# EAGLE board pointModule (EAGLE 5.11)
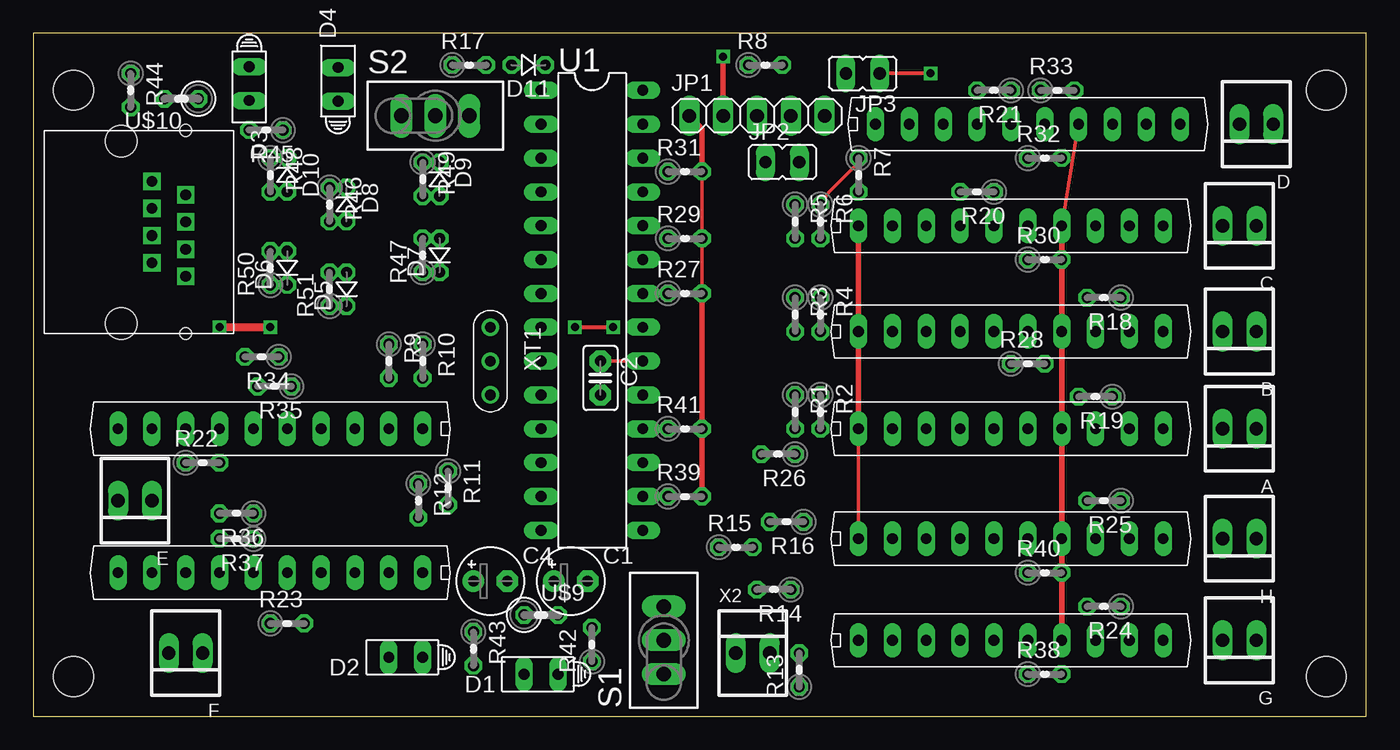
[diagram p0: board, top side]
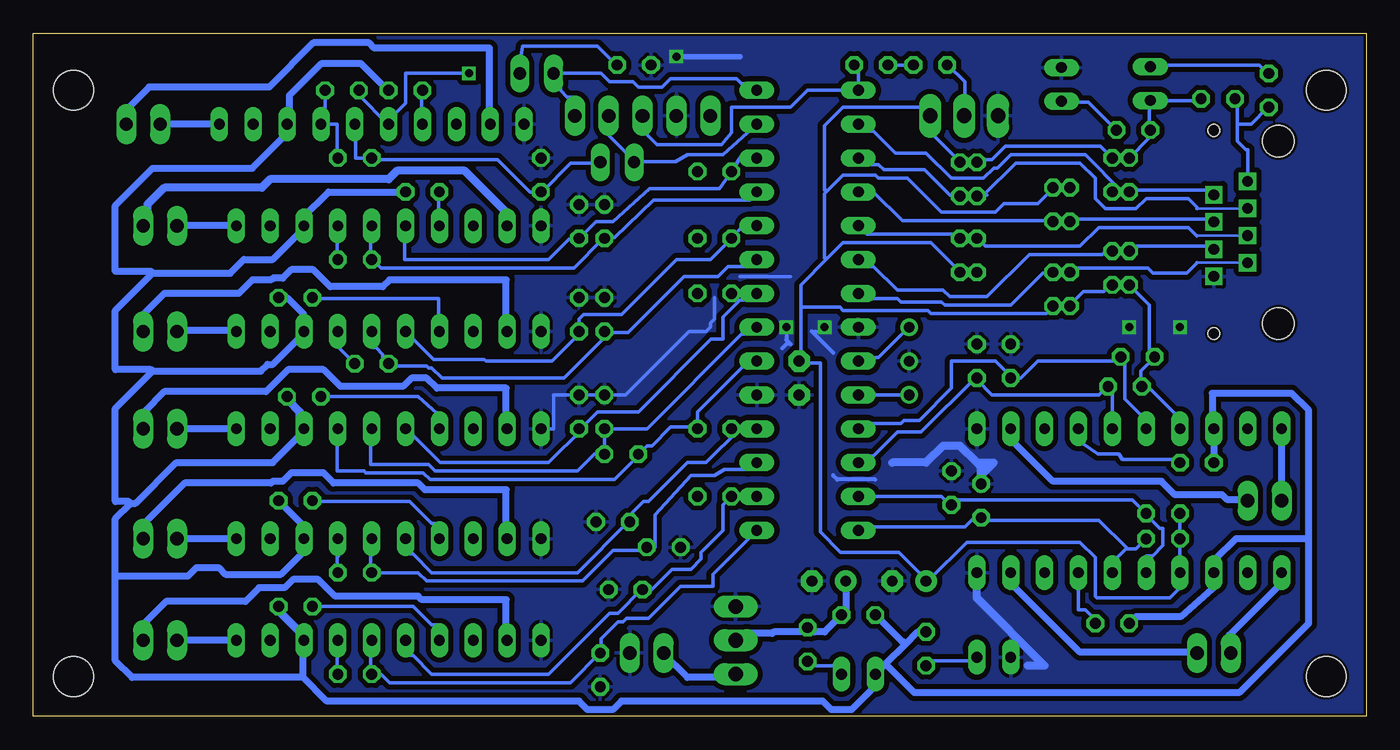
[diagram p1: board, bottom side, seen from below]

Size 100 x 51.27 mm. Coordinates in mm from the lower left corner, seen from the top.
Outline: 0,0 100,0 100,51.27 0,51.27 0,0
Copper layers (1*16): Top 0.035mm / dielectric 1.5mm / Bottom 0.035mm
Design rules "default *": minimum track width 10mil, minimum drill 24mil, track to track 15mil, track to pad 16mil, pad to pad 20mil, via to via 15mil, smd to smd 15mil, copper to edge 8mil, drill to drill 8mil, minimum pad ring 10mil, minimum via ring 8mil, stop-mask expansion 4mil, vias tented up to drill 0mil, thermal gap 10mil
Net classes: 1 12v: width 0.508 mm
Holes 3 mm at 3,47 97,47 97,3 3,3

## Footprints (pad centres in the part's own frame; a part is rotated, then mirrored left to right if it is on the bottom)
22-23-2021 = drill 1 long: 1 -1.27,0; 2 1.27,0
E2,5-5 = drill 0.813 pad 1.6 round: + -1.27,0 | drill 0.813 pad 1.6 octagon: - 1.27,0
C2.5-2 = drill 0.813 pad 1.6 octagon: 1 -1.27,0; 2 1.27,0
HLMP6 = drill 0.813 long: A -1.27,0; K 1.27,0
D-2.5 = drill 0.813 octagon: A 1.27,0; C -1.27,0
1X05 = drill 1.016 long: 1 -5.08,0; 2 -2.54,0; 3 0,0; 4 2.54,0; 5 5.08,0
JP1 = drill 0.914 long: 1 0,-1.27; 2 0,1.27
0204V = drill 0.813 octagon: 1 -1.27,0; 2 1.27,0
TL3XPO = drill 1.1 pad 1.422 long: 1 -2.54,0; 2 0,0; 3 2.54,0
DIL28-3 = drill 0.813 long: 1 -16.51,-3.81; 2 -13.97,-3.81; 3 -11.43,-3.81; 4 -8.89,-3.81; 5 -6.35,-3.81; 6 -3.81,-3.81; 7 -1.27,-3.81; 8 1.27,-3.81; 9 3.81,-3.81; 10 6.35,-3.81; 11 8.89,-3.81; 12 11.43,-3.81; 13 13.97,-3.81; 14 16.51,-3.81; 15 16.51,3.81; 16 13.97,3.81; 17 11.43,3.81; 18 8.89,3.81; 19 6.35,3.81; 20 3.81,3.81; 21 1.27,3.81; 22 -1.27,3.81; 23 -3.81,3.81; 24 -6.35,3.81; 25 -8.89,3.81; 26 -11.43,3.81; 27 -13.97,3.81; 28 -16.51,3.81
HSIP10 = drill 0.8 long: 1 -11.43,0; 2 -8.89,0; 3 -6.35,0; 4 -3.81,0; 5 -1.27,0; 6 1.27,0; 7 3.81,0; 8 6.35,0; 9 8.89,0; 10 11.43,0
0207/2V = drill 0.813 octagon: 1 -1.27,0; 2 1.27,0
C-00159 = drill 0.8 square: P$1 0,0.8; P$2 2.54,-0.22; P$3 0,-1.24; P$4 2.54,-2.26; P$5 0,-3.28; P$6 2.54,-4.3; P$7 0,-5.32; P$8 2.54,-6.34 | hole 2.4: -2.3,-9.885; -2.3,3.805 | hole 0.9: 2.54,4.605; 2.54,-10.635
S3P = drill 0.8 round: P$1 -2.54,0; P$2 0,0; P$3 2.54,0

## Placement (x,y rotation side)
A  22-23-2021  [22-23-2021]  90.49,21.59 180 top
B  22-23-2021  [22-23-2021]  90.49,28.89 180 top
C  22-23-2021  [22-23-2021]  90.49,36.83 180 top
C1  100 uF  [E2,5-5]  40.32,10.16 0 top
C2  0.1 uF  [C2.5-2]  42.55,25.4 270 top
C4  100 uF  [E2,5-5]  34.29,10.16 0 top
D  22-23-2021  [22-23-2021]  91.76,44.45 180 top
D1  HLMP6  [HLMP6]  38.1,3.17 180 top
D2  HLMP6  [HLMP6]  27.94,4.45 180 top
D3  HLMP6  [HLMP6]  16.19,47.5 270 top
D4  HLMP6  [HLMP6]  22.86,47.43 90 top
D5  1N4148DO35-7  [D-2.5]  23.5,32.07 90 top
D6  1N4148DO35-7  [D-2.5]  19.05,33.66 90 top
D7  1N4148DO35-7  [D-2.5]  30.48,34.61 90 top
D8  1N4148DO35-7  [D-2.5]  23.5,38.42 270 top
D9  1N4148DO35-7  [D-2.5]  30.48,40.32 270 top
D10  1N4148DO35-7  [D-2.5]  19.05,40.64 270 top
D11  [D-2.5]  37.15,48.9 180 top
E  22-23-2021  [22-23-2021]  7.62,16.19 180 top
F  22-23-2021  [22-23-2021]  11.43,4.76 180 top
G  22-23-2021  [22-23-2021]  90.49,5.71 180 top
H  22-23-2021  [22-23-2021]  90.49,13.34 180 top
JP1  [1X05]  54.29,45.09 0 top
JP2  [JP1]  56.2,41.59 270 top
JP3  [JP1]  62.23,48.26 90 top
R1  100k Ohm  [0204V]  57.15,22.86 270 top
R2  100k Ohm  [0204V]  59.05,22.86 270 top
R3  100k Ohm  [0204V]  57.15,30.16 270 top
R4  100k Ohm  [0204V]  59.05,30.16 270 top
R5  100k Ohm  [0204V]  57.15,37.15 270 top
R6  100k Ohm  [0204V]  59.05,37.15 270 top
R7  100k Ohm  [0204V]  61.91,40.64 270 top
R8  100k Ohm  [0204V]  54.93,48.9 0 top
R9  100k Ohm  [0204V]  26.67,26.67 270 top
R10  100k Ohm  [0204V]  29.21,26.67 270 top
R11  100k Ohm  [0204V]  31.11,17.14 270 top
R12  100k Ohm  [0204V]  28.89,16.19 270 top
R13  100k Ohm  [0204V]  57.47,3.49 90 top
R14  100k Ohm  [0204V]  55.56,9.53 180 top
R15  100k Ohm  [0204V]  52.7,12.7 0 top
R16  100k Ohm  [0204V]  56.52,14.61 180 top
R17  10k Ohm  [0204V]  32.7,48.9 0 top
R18  100k Ohm  [0204V]  80.33,31.43 180 top
R19  100k Ohm  [0204V]  79.69,24 180 top
R20  100k Ohm  [0204V]  70.8,39.37 180 top
R21  100k Ohm  [0204V]  72.07,46.99 180 top
R22  100k Ohm  [0204V]  12.7,19.05 0 top
R23  100k Ohm  [0204V]  19.05,6.99 0 top
R24  100k Ohm  [0204V]  80.33,8.26 180 top
R25  100k Ohm  [0204V]  80.33,16.19 180 top
R26  1k Ohm  [0204V]  55.88,19.68 180 top
R27  1k Ohm  [0204V]  48.9,31.75 0 top
R28  1k Ohm  [0204V]  74.61,26.48 0 top
R29  1k Ohm  [0204V]  48.9,35.88 0 top
R30  1k Ohm  [0204V]  75.88,34.29 0 top
R31  1k Ohm  [0204V]  48.9,40.89 0 top
R32  1k Ohm  [0204V]  75.88,41.91 0 top
R33  1k Ohm  [0204V]  76.83,46.99 0 top
R34  1k Ohm  [0204V]  17.14,26.99 180 top
R35  1k Ohm  [0204V]  18.1,24.77 180 top
R36  1k Ohm  [0204V]  15.24,15.24 180 top
R37  1k Ohm  [0204V]  15.24,13.34 180 top
R38  1k Ohm  [0204V]  75.88,3.17 0 top
R39  1k Ohm  [0204V]  48.9,16.51 0 top
R40  1k Ohm  [0204V]  75.88,10.79 0 top
R41  1k Ohm  [0204V]  48.9,21.59 0 top
R42  10k Ohm  [0204V]  41.91,5.4 90 top
R43  2k Ohm  [0204V]  33.02,5.08 270 top
R44  10k Ohm  [0204V]  7.3,46.99 270 top
R45  2k Ohm  [0204V]  17.46,44.01 180 top
R46  1k Ohm  [0204V]  22.23,38.42 270 top
R47  1k Ohm  [0204V]  29.21,34.61 90 top
R48  1k Ohm  [0204V]  17.78,40.64 270 top
R49  1k Ohm  [0204V]  29.21,40.32 270 top
R50  1k Ohm  [0204V]  17.78,33.66 90 top
R51  1k Ohm  [0204V]  22.23,32.07 90 top
S1  TL36PO  [TL3XPO]  47.31,5.71 90 top
S2  TL36PO  [TL3XPO]  30.16,45.09 0 top
U1  PIC18F2420-I/SP  [DIL28-3]  41.91,30.48 270 top
U$1  TA7291  [HSIP10]  73.34,21.59 0 top
U$2  TA7291  [HSIP10]  73.34,28.89 0 top
U$3  TA7291  [HSIP10]  73.34,36.83 0 top
U$4  TA7291  [HSIP10]  74.61,44.45 0 top
U$5  TA7291  [HSIP10]  17.78,21.59 180 top
U$6  TA7291  [HSIP10]  17.78,10.79 180 top
U$7  TA7291  [HSIP10]  73.34,5.71 0 top
U$8  TA7291  [HSIP10]  73.34,13.34 0 top
U$9  POLYSWITCH  [0207/2V]  38.1,7.62 0 top
U$10  POLYSWITCH  [0207/2V]  11.11,46.35 180 top
U$11  AKI-RJ45  [C-00159]  8.89,39.37 0 top
X2  22-23-2021  [22-23-2021]  53.98,4.76 0 top
XT1  CSTLS  [S3P]  34.29,26.67 270 top

## Library data of the parts
A B C D E F G H X2 = con-molex; MF: MOLEX; MPN: 22-23-2021; OC_FARNELL: 1462926; OC_NEWARK: 25C3832
C1 C4 R1-R51 = rcl
C2 = capacitor-wima
D1-D4 = display-hp; MF: AGILENT TECHNOLOGIES; MPN: HLMP-6500; OC_FARNELL: 1652490; OC_NEWARK: 40K0088
D5-D11 = diode
JP1 = pinhead
JP2 JP3 = jumper
S1 S2 = switch
U1 = pic18fxx20
U$1-U$8 = TA7291P
U$9-U$11 = myparts
XT1 = TOG

## Nets
+5V: C2.1 C4.+ D3.K D5.C D6.C D7.C D8.C D9.C D10.C JP1.1 R26.2 R27.2 R28.2 R29.2 R30.2 R31.2 R32.2 R33.2 R34.2 R35.2 R36.2 R37.2 R38.2 R39.2 R40.2 R41.2 R45.2 R46.1 R47.1 R48.1 R49.1 R50.1 R51.1 S2.3 U1.20 U$1.7 U$2.7 U$3.7 U$4.7 U$5.7 U$6.7 U$7.7 U$8.7 U$10.1
+12V [12v]: C1.+ R42.2 S1.2 U$9.2
GND: C1.- C2.2 C4.- D2.K D4.K JP1.2 R1.1 R2.1 R3.1 R4.1 R5.1 R6.1 R7.1 R8.1 R9.1 R10.1 R11.1 R12.1 R13.1 R14.1 R15.1 R16.1 S1.3 S2.1 U1.8 U1.19 U$1.1 U$2.1 U$3.1 U$4.1 U$5.1 U$6.1 U$7.1 U$8.1 U$11.P$8 X2.2 XT1.P$2
N$1 [12v]: S1.1 X2.1
N$2 [signal]: D6.A R50.2 U1.6 U$11.P$6
N$3: D5.A R51.2 U1.7 U$11.P$7
N$4: D11.C JP1.3 U1.1
N$5: JP1.5 JP3.2 U1.28
N$6: R17.1 S2.2
N$7: R18.2 U$2.4
N$8: R1.2 R26.1 U1.21 U$1.6
N$9: U1.9 XT1.P$1
N$10: U1.10 XT1.P$3
N$11: R2.2 R27.1 U1.22 U$1.5
N$12 [12v]: A.1 U$1.2
N$13 [12v]: A.2 U$1.10
N$14: D11.A R17.2
N$15: R4.2 R29.1 U1.24 U$2.5
N$16 [12v]: B.1 U$2.2
N$17 [12v]: B.2 U$2.10
N$18: JP1.4 JP2.1 U1.27
N$19: R6.2 R31.1 U1.26 U$3.5
N$20 [12v]: C.1 U$3.2
N$21 [12v]: C.2 U$3.10
N$23: JP3.1 R8.2 R33.1 U$4.5
N$24 [12v]: D.1 U$4.2
N$25 [12v]: D.2 U$4.10
N$26 [signal]: D8.A R46.2 U1.4 U$11.P$4
N$27: R10.2 R35.1 U1.12 U$5.5
N$28 [12v]: E.1 U$5.2
N$29 [12v]: E.2 U$5.10
N$31: R12.2 R37.1 U1.14 U$6.5
N$32 [12v]: F.1 U$6.2
N$33 [12v]: F.2 U$6.10
N$34 [signal]: D7.A R47.2 U1.5 U$11.P$5
N$35: R14.2 R39.1 U1.16 U$7.5
N$36 [12v]: G.1 U$7.2
N$37 [12v]: G.2 U$7.10
N$39: R16.2 R41.1 U1.18 U$8.5
N$40 [12v]: H.1 U$8.2
N$41 [12v]: H.2 U$8.10
N$42: R19.2 U$1.4
N$43 [signal]: D10.A R48.2 U1.2 U$11.P$2
N$44: R20.2 U$3.4
N$45: R21.2 U$4.4
N$46: R22.2 U$5.4
N$47: R23.2 U$6.4
N$48: R24.2 U$7.4
N$49: R25.2 U$8.4
N$50: R3.2 R28.1 U1.23 U$2.6
N$51: R5.2 R30.1 U1.25 U$3.6
N$52: JP2.2 R7.2 R32.1 U$4.6
N$53: R9.2 R34.1 U1.11 U$5.6
N$54: R11.2 R36.1 U1.13 U$6.6
N$55: R13.2 R38.1 U1.15 U$7.6
N$56: R15.2 R40.1 U1.17 U$8.6
N$57 [signal]: D9.A R49.2 U1.3 U$11.P$3
N$66: D2.A R43.2
N$67: D1.A R42.1
N$68: R44.2 U$10.2 U$11.P$1
N$69: D3.A R44.1
N$70: D4.A R45.1
N$72 [12v]: D1.K R18.1 R19.1 R20.1 R21.1 R22.1 R23.1 R24.1 R25.1 R43.1 U$1.8 U$2.8 U$3.8 U$4.8 U$5.8 U$6.8 U$7.8 U$8.8 U$9.1

## Tracks (layer width: path | path; a pad name or v marks a point on that pad's centre or on a via)
+5V
  Top 0.254: C2.1 U1.20 | U$3.7 U$4.7 | R31.2 R29.2 R27.2
  Top 0.406: U$3.7 U$2.7 U$1.7 U$8.7 U$7.7 | R39.2 R41.2 R27.2 | R31.2 50.16,44.13 JP1.1
  Bottom 0.254: R30.2 77.22,34.29 77.22,36.83 U$3.7 | 77.09,12.06 77.09,13.34 U$8.7 77.09,12.06 | U1.20 46.35,26.67 50.16,22.86 50.16,21.72 | 50.16,21.72 52.2,21.72 53.59,20.32 53.98,20.32 R26.2 54.48,19.68 56.39,17.78 70.23,17.78 70.74,18.29 75.06,18.29 75.18,18.41 77.22,18.41 77.22,21.59 U$1.7 | 50.16,21.72 R41.2 | D8.C R46.1 | D8.C 23.5,39.75 | R38.2 77.22,3.17 77.22,5.71 U$7.7 | 77.09,12.06 77.22,12.06 77.22,10.79 R40.2 | 33.02,10.29 32.77,10.29 29.97,13.08 21.46,13.08 20.32,11.94 20.32,9.02 20.19,8.89 14.73,8.89 13.97,9.65 U$6.7 R37.2 R36.2 | 33.02,10.29 35.05,12.32 39.43,12.32 40.96,13.84 40.96,26.54 42.42,26.54 C2.1 42.42,26.67 42.42,30.73 | 33.02,10.29 C4.+ | D9.C R49.1 | 22.23,30.86 23.5,30.86 D5.C 23.5,30.73 24,30.23 32.64,30.23 32.89,30.48 39.24,30.48 39.5,30.73 42.42,30.73 | 22.23,30.86 21.21,31.88 19.68,31.88 19.18,32.38 D6.C R50.1 16.26,30.86 16.26,27.05 15.88,27.05 R34.2 15.88,26.92 16.89,25.91 16.89,24.77 R35.2 16.38,24.77 14.35,22.73 13.97,22.73 U$5.7 | 22.23,30.86 R51.1 | 78.11,44.45 R33.2 | 78.11,44.45 77.22,44.45 77.22,41.91 R32.2 | U$4.7 78.11,44.45 | D9.C 30.48,41.66 32.64,43.81 32.64,45.09 S2.3 32.77,45.09 33.4,45.72 39.24,45.72 40.64,44.32 40.64,39.5 40.51,39.5 40.45,39.43 | 30.48,33.4 29.21,33.4 R47.1 | 30.48,33.4 32.64,35.56 39.24,35.56 40.45,34.35 | 40.45,34.35 42.42,32.38 42.42,30.73 | 30.48,33.4 D7.C | 40.45,39.43 40.64,39.24 40.64,34.42 40.51,34.42 40.45,34.35 | 40.45,39.43 39.24,40.64 36.83,40.64 36.58,40.39 34.42,40.39 31.88,37.85 27.81,37.85 27.18,38.48 24.64,38.48 23.5,39.62 D8.C | U$10.1 12.45,46.35 12.57,46.23 D3.K 16.26,46.23 16.26,44.07 R45.2 16.26,43.94 16.26,43.43 R48.1 D10.C 19.94,42.8 27.05,42.8 28.07,41.78 30.48,41.78 D9.C
  Bottom 0.254: R28.2 77.09,27.69 77.09,28.83 U$2.7
+12V
  Bottom 0.508: C1.+ 38.99,10.16 38.99,7.75 39.24,7.75 U$9.2 40.64,6.35 41.4,6.35 41.66,6.6 41.91,6.6 R42.2 41.66,6.35 44.45,6.35 44.58,6.22 46.74,6.22 47.24,5.71 S1.2
GND  (via drill 0.6)
  Top 0.254: R7.1 62.23,41.91 59.69,39.37 R6.1 | U$8.1 U$1.1
  Top 0.305: v40.64,29.21 v43.5,29.21
  Top 0.406: JP1.2 v51.75,49.53 | U$3.1 U$2.1 U$1.1
  Top 0.61: v13.97,29.21 v17.78,29.21
  Bottom 0.254: 43.18,33.02 46.99,33.02 | 48.9,31.43 48.9,29.84 49.21,29.53 49.21,29.21 49.53,28.89 50.8,28.89 55.56,24.13 60.96,24.13 60.96,21.59 U$1.1
  Bottom 0.305: 36.83,17.78 39.69,17.78 40.01,18.1 | 40.01,27.3 41.59,28.89 40.96,28.89 v40.64,29.21 | v43.5,29.21 43.5,28.26 43.18,27.94 43.5,27.94 43.81,27.62
  Bottom 0.406: v51.75,49.53 46.99,49.53
  Bottom 0.61: 29.21,19.05 27.94,19.05 28.89,18.1 R12.1 28.89,18.73 29.21,19.05 | U$6.1 29.21,8.89 24.13,3.81 25.4,3.81 | 29.21,19.05 30.48,20.32 31.75,20.32 33.02,19.05 35.56,19.05
  other vias: 61.91,21.59
  pour Bottom: -2.54,52.07 -2.54,0 100.33,0 100.33,52.07
N$1
  Bottom 0.508: X2.1 52.7,4.7 50.93,2.92 47.62,2.92 47.37,3.17 S1.1
N$2
  Bottom 0.254: U$11.P$6 11.43,35.18 11.56,35.31 17.27,35.31 17.65,34.92 R50.2 D6.A 19.56,34.92 19.81,34.67 25.27,34.67 28.45,31.5 31.24,31.5 31.75,32 35.18,32 36.96,33.78 37.59,33.78 U1.6
N$3
  Bottom 0.2: U$11.P$7 12.7,34.05
  Bottom 0.254: 22.23,33.4 23.5,33.4 D5.A 23.5,33.27 24.26,33.27 26.67,30.86 31.62,30.86 31.88,31.11 34.92,31.11 35.18,31.37 37.72,31.37 U1.7 | 22.23,33.4 21.84,33.4 21.59,33.66 16.38,33.66 16,33.27 13.46,33.27 12.7,34.04 12.7,34.05 | 22.23,33.4 R51.2
N$4
  Bottom 0.254: D11.C 38.1,48.9 U1.1 41.91,46.99 43.18,45.72 47.62,45.72 47.62,43.81 48.39,42.93 53.21,42.93 54.36,44.07 54.36,45.02 JP1.3
N$5
  Bottom 0.254: U1.28 46.23,47.5 46.86,47.5 47.24,47.88 52.2,47.88 52.83,47.24 54.61,47.24 54.99,47.62 56.77,47.62 57.4,48.26 60.45,48.26 | 60.45,48.26 60.45,46.99 59.94,46.48 59.44,46.48 59.44,45.09 JP1.5 | 60.45,48.26 JP3.2
N$6
  Bottom 0.254: R17.1 31.37,48.9 30.1,47.62 30.1,45.09 S2.2
N$7
  Bottom 0.254: U$2.4 69.6,28.96 69.6,31.37 78.99,31.37 R18.2
N$8
  Bottom 0.254: U1.21 46.23,28.7 46.86,28.7 53.98,21.59 R1.2 R26.1 57.91,19.68 59.18,18.41 69.85,18.41 70.36,18.92 74.68,18.92 74.68,21.59 U$1.6
N$9
  Bottom 0.254: XT1.P$1 36.58,26.92 36.83,26.92 37.08,26.67 U1.9
N$10
  Bottom 0.254: XT1.P$3 U1.10
N$11
  Bottom 0.254: 72.14,21.59 U$1.5 72.01,21.59 69.47,19.05 61.34,19.05 58.8,21.59 58.93,21.59 | U1.22 46.23,31.24 46.99,31.24 47.05,31.18 | 47.05,31.18 48.26,29.97 48.26,28.32 49.15,28.32 54.61,22.86 57.66,22.86 58.93,21.59 | R27.1 47.05,31.18 | 58.93,21.59 R2.2
N$12
  Bottom 0.508: U$1.2 64.52,21.59 64.52,24.64 69.72,24.64 70.48,25.4 71.63,25.4 72.26,24.77 76.96,24.77 78.23,26.04 80.9,26.04 82.55,24.38 90.17,24.38 91.69,22.86 91.69,21.59 A.1
N$13
  Bottom 0.508: U$1.10 A.2
N$14
  Bottom 0.254: R17.2 D11.A
N$15
  Bottom 0.254: U1.24 46.74,36.83 47.62,35.94 R29.1 49.21,34.29 51.75,34.29 55.88,30.16 58.74,30.16 59.05,29.84 R4.2 59.05,28.7 61.09,26.67 66.04,26.67 66.17,26.8 69.98,26.8 U$2.5
N$16
  Bottom 0.508: U$2.2 64.52,28.96 64.52,32.77 73.28,32.77 73.79,32.26 77.72,32.26 78.99,33.53 80.64,33.53 81.28,32.89 82.04,32.89 82.17,32.77 83.57,32.77 84.58,31.75 90.17,31.75 91.69,30.23 91.69,28.96 B.1
N$17
  Bottom 0.508: U$2.10 84.84,28.96 89.15,28.96 B.2
N$18
  Bottom 0.254: U1.27 48.26,42.16 50.93,42.16 51.82,41.66 54.86,41.66 | 54.86,41.66 56.77,43.56 56.77,45.09 JP1.4 | 54.86,41.66 JP2.1
N$19
  Bottom 0.254: U1.26 46.99,41.91 R31.1 48.51,39.62 53.78,39.62 56.52,37.15 57.78,37.15 R6.2 59.05,35.81 59.82,35.81 61.34,34.29 72.14,34.29 72.14,36.83 U$3.5
N$20
  Bottom 0.61: U$3.2 64.45,37.78 67.63,40.96 72.71,40.96 73.34,40.32 82.23,40.32 82.87,39.69 90.17,39.69 91.44,38.42 91.44,37.15 C.1
N$21
  Bottom 0.508: U$3.10 C.2
N$23  (via drill 0.6)
  Top 0.254: JP3.1 v67.31,48.26
  Bottom 0.254: R33.1 75.56,46.61 73.41,44.45 U$4.5 73.34,44.77 72.07,46.04 72.07,48.26 v67.31,48.26 | JP3.1 63.5,49.15 63.31,50.29 57.66,50.29 56.26,48.9 R8.2
N$24
  Bottom 0.508: U$4.2 65.79,44.45 65.79,50.16 74.42,50.16 74.8,50.55 78.99,50.55 82.3,47.24 91.31,47.24 92.96,45.59 92.96,44.45 D.1
N$25
  Bottom 0.508: U$4.10 D.2
N$26
  Bottom 0.254: 22.23,37.21 23.5,37.21 | U1.4 36.96,39.37 34.8,37.21 23.5,37.21 | 22.23,37.21 22.1,37.34 11.56,37.34 11.43,37.21 U$11.P$4 | 22.23,37.21 R46.2 | 23.5,37.21 D8.A
N$27
  Bottom 0.254: U$5.5 19.05,24.77 R35.1 19.43,24.77 20.07,24.13 28.07,24.13 29.21,25.27 29.34,25.27 R10.2 29.34,25.4 33.4,21.34 35.18,21.34 36.96,19.56 37.59,19.56 U1.12
N$28
  Bottom 0.508: U$5.2 26.67,20.57 26.42,20.57 23.5,17.65 15.37,17.65 14.35,16.64 10.79,16.64 10.41,16.26 8.89,16.26 E.1
N$29
  Bottom 0.508: E.2 U$5.10
N$31
  Bottom 0.254: U$6.5 19.05,11.94 18.67,11.94 17.97,12.64 | U1.14 37.85,14.22 30.1,14.22 29.46,14.86 28.96,14.86 R12.2 29.46,14.73 20.07,14.73 17.97,12.64 | R37.1 17.27,12.57 17.91,12.57 17.97,12.64
N$32
  Bottom 0.508: U$6.2 26.67,9.78 26.42,9.78 21.46,4.83 12.7,4.83 F.1
N$33
  Bottom 0.508: U$6.10 6.35,9.78 6.6,9.78 10.29,6.1 10.29,4.83 10.16,4.83 F.2
N$34
  Bottom 0.2: U$11.P$5 12.7,36.09
  Bottom 0.254: 30.48,35.94 29.21,35.94 R47.2 29.21,35.81 29.08,35.81 28.57,35.31 21.46,35.31 20.07,36.7 13.34,36.7 12.7,36.07 12.7,36.09 | U1.5 37.47,36.2 30.73,36.2 30.48,35.94 | 30.48,35.94 D7.A
N$35
  Bottom 0.254: U1.16 R39.1 48.26,15.88 48.26,13.97 49.91,12.32 49.91,11.81 50.67,11.05 52.07,11.05 53.59,9.53 R14.2 54.36,9.53 56.13,7.75 56.77,7.75 61.34,3.17 70.1,3.17 71.5,4.57 72.01,4.57 72.01,5.71 U$7.5
N$36
  Bottom 0.508: U$7.2 64.52,5.71 64.52,8.76 70.87,8.76 71.12,9.02 77.34,9.02 78.61,10.29 80.52,10.29 81.15,9.65 83.06,9.65 84.07,8.64 90.04,8.64 91.69,6.99 91.69,5.71 G.1
N$37
  Bottom 0.508: 84.84,5.78 U$7.10 G.2
N$39
  Bottom 0.254: R41.1 46.99,21.59 | 46.99,21.59 U1.18 | 46.99,21.59 49.53,19.05 50.93,19.05 53.85,16.13 54.23,16.13 55.24,15.11 R16.2 55.37,14.61 59.18,10.79 70.1,10.79 71.5,12.19 72.01,12.19 72.01,13.34 U$8.5
N$40
  Bottom 0.508: U$8.2 64.52,13.34 64.52,17.02 70.61,17.02 71.12,17.53 77.47,17.53 78.23,18.29 80.64,18.29 81.28,17.65 82.04,17.65 82.17,17.53 88.65,17.53 91.69,14.48 91.69,13.34 H.1
N$41
  Bottom 0.508: U$8.10 H.2
N$42
  Bottom 0.254: 69.47,21.65 U$1.4 69.47,21.72 69.47,22.73 69.72,22.73 71.12,24 R19.2
N$43
  Bottom 0.254: U$11.P$2 11.43,39.24 11.68,39.5 17.65,39.5 R48.2 18.29,39.37 | 18.29,39.37 D10.A | U1.2 37.59,43.94 36.96,43.94 35.31,42.29 33.02,42.29 31.11,40.39 28.7,40.39 27.94,41.15 27.69,41.15 26.67,42.16 21.08,42.16 18.29,39.37
N$44
  Bottom 0.254: U$3.4 69.6,36.83 69.6,39.37 R20.2
N$45
  Bottom 0.254: U$4.4 70.87,44.45 70.87,46.99 R21.2
N$46
  Bottom 0.254: U$5.4 21.59,20.45 21.21,20.45 20.13,19.68 18.54,19.68 18.29,19.3 13.97,19.3 R22.2
N$47
  Bottom 0.254: U$6.4 21.59,8 21.08,8 20.32,7.24 R23.2
N$48
  Bottom 0.254: U$7.4 69.6,5.71 69.6,6.86 70.1,6.86 71.5,8.26 R24.2
N$49
  Bottom 0.254: U$8.4 69.6,13.34 69.6,14.48 70.1,14.48 71.75,16.13 78.99,16.13 R25.2
N$50
  Bottom 0.254: U$2.6 74.55,28.83 74.55,27.69 74.3,27.69 73.79,27.18 73.79,26.54 73.41,26.54 R28.1 73.15,26.29 70.48,26.29 70.36,26.16 70.1,26.16 69.34,25.4 60.2,25.4 56.77,28.83 | U1.23 46.23,33.78 47.88,33.78 48.64,33.02 51.18,33.02 55.37,28.83 56.77,28.83 | 56.77,28.83 57.15,28.83 R3.2 56.77,28.83
N$51
  Bottom 0.254: U$3.6 74.68,36.83 74.68,34.29 R30.1 74.55,34.29 73.91,33.66 59.44,33.66 57.28,35.81 57.15,35.81 R5.2 57.15,35.94 56.39,35.94 53.47,38.73 46.23,38.73 U1.25
N$52
  Bottom 0.254: JP2.2 57.53,41.53 59.69,41.53 61.85,39.37 R7.2 62.74,39.37 65.15,41.78 74.42,41.78 74.55,41.91 R32.1 75.82,41.91 75.82,44.45 U$4.6
N$53
  Bottom 0.254: 26.54,25.4 25.91,25.4 24.64,26.67 18.67,26.67 18.41,26.92 R34.1 18.1,26.67 18.1,23.81 16.51,22.23 U$5.6 | U1.11 37.72,21.97 34.92,21.97 34.67,22.23 33.53,22.23 31.11,24.64 31.11,26.67 27.81,26.67 26.54,25.4 | 26.54,25.4 R9.2
N$54
  Bottom 0.254: R11.2 30.73,16 | U1.13 31.88,16.51 31.24,15.88 R11.2 | R11.2 30.73,16.13 | U$6.6 16.51,12.06 16,12.06 15.24,12.83 15.24,14.1 15.49,14.1 16.51,15.11 R36.1 17.53,16.26 30.73,16.26 R11.2
N$55
  Bottom 0.254: U$7.6 74.68,5.71 74.68,3.17 R38.1 73.91,3.17 73.28,2.54 59.69,2.54 R13.2 57.4,4.83 57.4,5.84 56.13,7.11 55.75,7.11 55.5,7.37 53.85,7.37 51.44,9.78 49.02,9.78 49.02,10.67 U1.15
N$56
  Bottom 0.254: U$8.6 74.68,13.34 74.68,10.79 R40.1 71.12,10.79 70.48,10.16 58.8,10.16 56.52,12.45 54.61,12.45 54.36,12.7 R15.2 53.34,12.7 53.34,15.11 50.67,18.1 48.9,18.1 48.13,18.54 46.23,18.54 U1.17
N$57
  Bottom 0.2: U$11.P$3 12.67,38.13
  Bottom 0.254: 12.7,38.1 12.67,38.13 12.7,38.23 13.34,38.86 16.51,38.86 17.27,38.1 19.56,38.1 20.32,38.86 20.32,40.39 21.46,41.53 26.29,41.53 28.7,39.12 | 29.21,39.12 30.48,39.12 | U1.3 37.59,41.4 36.58,41.4 36.2,41.02 33.15,41.02 31.24,39.12 30.48,39.12 | 30.48,39.12 D9.A | 28.7,39.12 29.21,39.12 | 28.7,39.12 28.45,39.12 | 29.21,39.12 R49.2 28.7,39.12
N$66
  Bottom 0.254: D2.A 29.46,4.19 32.51,4.19 32.89,3.81 R43.2
N$67
  Bottom 0.254: D1.A 40.01,3.81 41.27,3.81 41.53,4.06 41.91,4.06 R42.1
N$68
  Bottom 0.254: 9.65,44.45 9.65,46.35 U$10.2 | 9.65,44.45 9.65,43.18 9.02,42.55 8.89,42.55 U$11.P$1 | 9.65,44.45 8.64,44.45 7.37,45.72 R44.2
N$69
  Bottom 0.254: R44.1 7.37,48.26 8,48.9 16,48.9 16.13,48.77 D3.A
N$70
  Bottom 0.254: R45.1 20.83,46.1 22.86,46.1 D4.A
N$72
  Bottom 0.508: R22.1 U$5.8 11.56,21.72 11.56,24.26 5.59,24.26 4.32,22.99 4.32,13.34 | R20.1 77.85,39.37 79.76,37.47 79.76,37.08 U$3.8 79.76,36.58 82.04,34.29 84.2,34.29 85.22,33.27 91.06,33.27 | R23.1 17.27,7.49 13.91,7.49 11.24,9.84 11.56,10.67 U$6.8 11.3,10.92 11.3,11.81 9.78,13.34 4.32,13.34 | R25.1 79.76,14.35 79.76,13.59 U$8.8 79.76,13.08 79.76,12.32 81.41,10.67 85.6,10.67 86.11,11.18 87.76,11.18 88.39,10.54 93.85,10.54 | R18.1 81.53,31.37 80.9,31.37 79.76,30.23 79.76,28.96 U$2.8 79.76,28.7 82.04,26.42 82.42,26.42 82.93,25.91 91.06,25.91 | 81.66,8.26 R24.1 | R21.1 73.41,46.99 75.44,49.02 78.36,49.02 80.77,46.61 80.77,44.58 U$4.8 80.9,44.2 80.9,43.43 81.28,43.43 83.57,41.15 91.06,41.15 93.85,38.35 93.85,33.4 91.19,33.4 91.06,33.27 | 34.54,5.46 33.66,6.35 R43.1 | 36.07,3.94 34.54,5.46 | 36.07,3.94 D1.K 36.96,3.05 36.96,2.16 38.61,0.51 40.13,0.51 40.77,1.14 55.88,1.14 56.52,0.51 58.42,0.51 59.05,1.14 77.98,1.14 79.76,2.92 | U$9.1 34.8,5.59 34.67,5.59 34.54,5.46 | 36.07,3.94 33.91,1.78 9.53,1.78 4.32,6.99 4.32,13.34 | 79.76,2.92 79.76,5.46 U$7.8 | 79.76,2.92 92.58,2.92 93.85,4.19 93.85,10.54 | 92.71,16 92.33,16 89.28,19.05 82.04,19.05 79.76,21.34 U$1.8 79.76,21.84 | 92.71,16 93.85,14.86 93.85,10.54 | 91.06,25.91 93.85,23.11 93.85,16.13 92.84,16.13 92.71,16 | 91.06,33.27 93.85,30.48 93.85,26.04 91.19,26.04 91.06,25.91 | 80.9,24 R19.1
  Bottom 0.61: 81.66,8.26 81.66,8 80.01,6.35 80.01,6.03 U$7.8 | 80.9,24 80.9,23.75 80.01,22.86 80.01,21.91 U$1.8